# EAGLE board HW2 (EAGLE 8.7.1)

Size 50 x 50 mm. Coordinates in mm from the lower left corner, seen from the top.
Outline: 0,0 50,0 50,50 0,50 0,0
Copper layers (1*16): Top 0.035mm / dielectric 1.5mm / Bottom 0.035mm
Design rules "default": minimum track width 6mil, minimum drill 0.35mm, track to track 6mil, track to pad 6mil, pad to pad 6mil, via to via 6mil, smd to smd 6mil, copper to edge 40mil, drill to drill 6mil, minimum pad ring 10mil, minimum via ring 8mil, stop-mask expansion 4mil, vias tented up to drill 0mil, thermal gap 10mil

## Footprints (pad centres in the part's own frame; a part is rotated, then mirrored left to right if it is on the bottom)
LED3MM = drill 0.813 octagon: A -1.27,0; K 1.27,0
0207/10 = drill 0.813 octagon: 1 -5.08,0; 2 5.08,0

## Placement (x,y rotation side)
LED1  [LED3MM]  7.62,25.4 0 top
LED2  [LED3MM]  5.08,13.97 0 top
R1  [0207/10]  13.97,20.32 90 top

## Library data of the parts
LED1 LED2 = led
R1 = resistor

## Nets
+3V3: LED2.A
GND: R1.1
LEDCONNECT: LED1.K R1.2
N$1: LED1.A LED2.K

## Tracks (layer width: path | path; a pad name or v marks a point on that pad's centre or on a via)
LEDCONNECT  (1 unrouted)
N$1  (1 unrouted)
(copper drawn outside any net)
  shapes: Top area x1